# Altium PCB 主板-20190829.PcbDoc (part 5 of 6)
Units mm, origin at the board's own origin, x right, y up, seen from the top; angles counter-clockwise.
Board outline 97.69 x 103.45 mm, 2 copper layers (Top Layer, Bottom Layer); 77 components, 70 nets, 247 pads, 251 vias.
Unrouted connection lines stored in the file: 4.
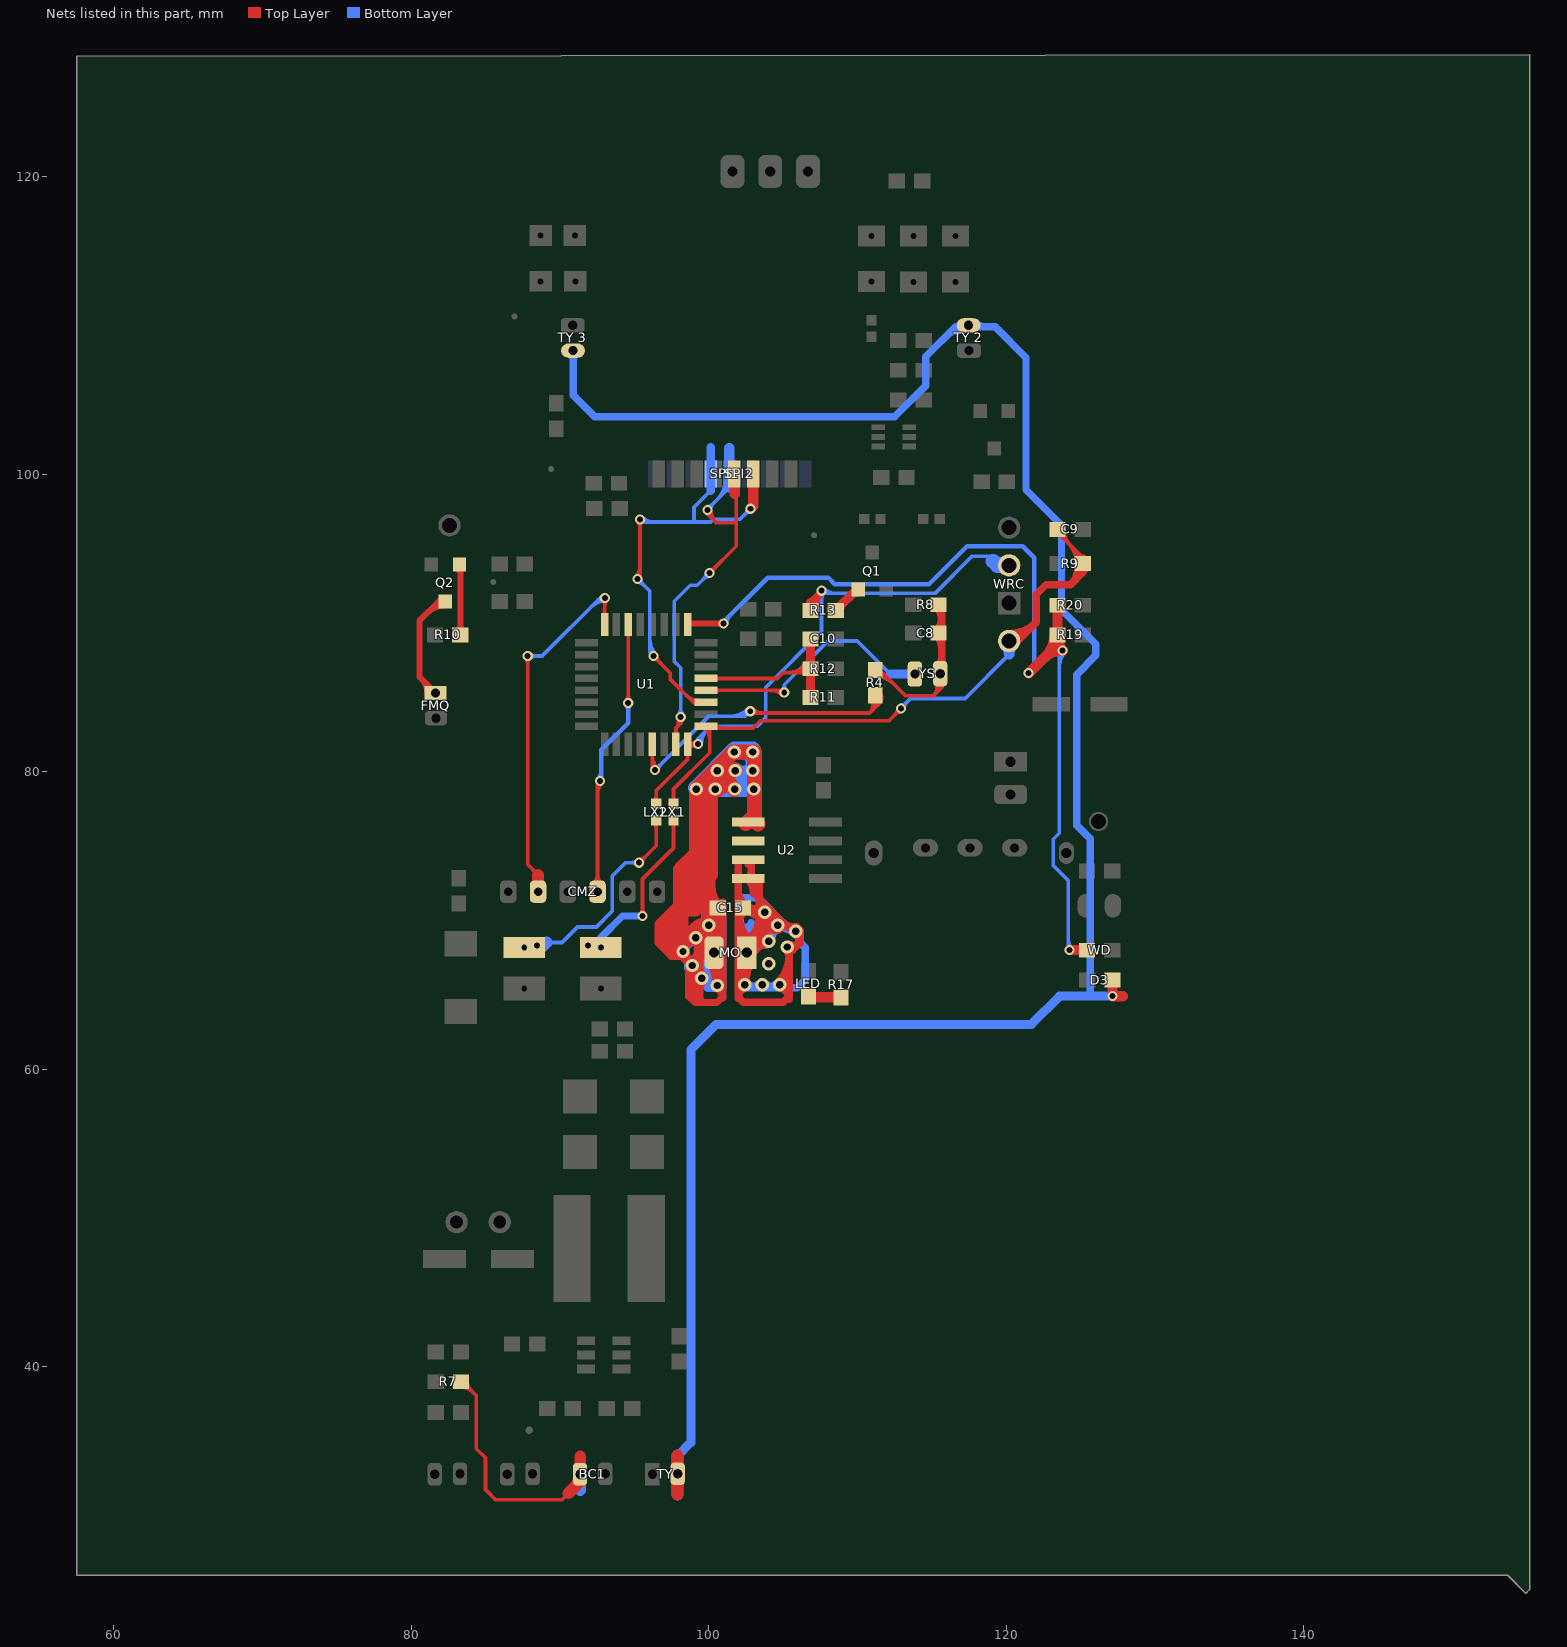
[diagram p5: the nets of this part, all layers, seen from the top]

## Via types
v1: diameter 0.9, hole 0.5, Top Layer to Bottom Layer, 107 vias
v2: diameter 0.68, hole 0.4, Top Layer to Bottom Layer, 87 vias
v3: diameter 1.1, hole 0.6, Top Layer to Bottom Layer, tented both sides, 17 vias
v4: diameter 0.6, hole 0.4, Top Layer to Bottom Layer, 7 vias
v5: diameter 0.8, hole 0.5, Top Layer to Bottom Layer, 5 vias
v6: diameter 0.7, hole 0.4, Top Layer to Bottom Layer, 5 vias
v7: diameter 1, hole 0.6, Top Layer to Bottom Layer, 4 vias
v8: diameter 1, hole 0.8, Top Layer to Bottom Layer, tented both sides, 4 vias
v9: diameter 1, hole 0.65, Top Layer to Bottom Layer, tented both sides, 4 vias
v10: diameter 1.2, hole 0.7, Top Layer to Bottom Layer, tented both sides, 2 vias
v11: diameter 1.1, hole 0.68, Top Layer to Bottom Layer, 2 vias
v12: diameter 0.8, hole 0.4, Top Layer to Bottom Layer, 2 vias
v13: diameter 0.9, hole 0.6, Top Layer to Bottom Layer, tented bottom, 1 vias
v14: diameter 0.95, hole 0.5, Top Layer to Bottom Layer, 1 vias
v15: diameter 0.9, hole 0.6, Top Layer to Bottom Layer, tented both sides, 1 vias
v16: diameter 1, hole 0.5, Top Layer to Bottom Layer, 1 vias
v17: diameter 1.1, hole 0.5, Top Layer to Bottom Layer, tented both sides, 1 vias

## Nets (pads, with @x,y where several pads share a name; then routed paths per layer and width w, separated by ;. In a path a pad name is that pad's centre, name@x,y a point inside that pad or via, vN(x,y) a via of type N, cw(c..) or ccw(c..) an arc to the next point about the centre after c; other vN are vias at no path point) (continued)
MOSI: SPI1.3 SPI2.3 U1.3 | length 39.9
  Top Layer w0.254: v2@95.074,93.115 ccw(c94.342,93.846) 95.377,93.846 ; v2(95.225,92.964) 95.377,92.812 v2(95.377,96.977) ; v2@95.226,96.827 cw(c94.863,96.463) 95.377,96.463 cw(c95.891,96.463) v2@95.528,96.827 ; v2@96.291,87.569 cw(c96.291,87.055) 96.655,87.419 cw(c97.019,87.782) v2@96.504,87.782 ; v2(96.291,87.782) 97.409,86.665 97.409,86.233 98.965,84.677 U1.3@99.825,84.677 ; 98.517,85.125 ccw(c99.3,85.907) U1.3@99.3,84.8 ; 98.951,84.691 ccw(c99.3,85.04) U1.3@99.3,84.546 ; U1.3@99.213,84.59 ccw(c99.003,84.38) 99.003,84.677 ccw(c99.003,84.974) U1.3@99.213,84.764
  Top Layer w0.7: v2(102.819,97.688) v2@102.997,97.866 ; v2@102.826,97.681 ccw(c102.414,98.094) 102.997,98.094 ; 102.997,97.993 SPI1.3@102.997,100.032
  Bottom Layer w0.254: v2@95.225,92.751 cw(c95.225,92.237) 95.588,92.6 cw(c95.952,92.964) v2@95.438,92.964 ; v2(95.225,92.964) 96.037,92.151 96.037,88.036 v2(96.291,87.782) ; v2@95.348,96.948 ccw(c95.707,97.307) 95.707,96.799 ; v2(95.377,96.977) 95.555,96.799 100.13,96.799 100.308,96.977 102.108,96.977 v2(102.819,97.688) ; v2@95.528,97.128 ccw(c96.32,97.921) 96.32,96.799 ; 96.037,88.297 ccw(c96.806,88.297) v2@96.262,87.753 ; 96.037,88.91 ccw(c97.419,88.91) v2@96.442,87.933 ; 99.009,96.799 99.009,97.79 100.14,98.921 ; v2@102.606,97.688 cw(c102.092,97.688) 102.456,97.325 cw(c102.819,96.961) v2@102.819,97.475
  Bottom Layer w0.6: 100.14,98.921 100.14,101.803
NetC4_1: C15.1 MO.2 U2.5 U2.6 | length 305
  Top Layer w0.254: 96.596,69.139 96.596,69.469 96.85,69.723 96.876,69.723 ; 97.027,68.758 ccw(c98.273,70.004) v1@98.273,68.243 ; 97.231,70.202 97.231,69.698 ; 97.461,68.325 ccw(c98.273,69.136) v1@98.273,67.989 ; 97.585,67.958 ccw(c97.585,68.607) v1@98.044,68.148 ; 97.587,68.072 96.876,68.783 ; v1@98.035,67.7 ccw(c97.447,67.157) 97.447,67.958 ; 96.876,68.783 96.876,69.723 ; 96.876,68.783 96.774,68.885 96.596,68.885 96.596,68.809 97.447,67.958 ; 96.876,69.723 96.876,70.053 97.206,69.723 ; 96.876,69.723 97.206,69.723 ; 97.079,69.367 96.952,69.367 97.231,69.647 ; 97.079,69.367 97.561,69.367 97.257,69.672 ; 97.079,69.367 96.977,69.266 96.977,68.809 97.828,67.958 97.447,67.958 ; 97.079,69.367 97.231,69.52 97.231,69.647 ; 97.206,69.723 97.231,69.698 ; 97.231,69.647 97.231,69.698 ; 97.231,69.647 97.257,69.672 ; 97.231,69.698 97.257,69.672
  Top Layer w0.5: 97.184,69.295 97.561,69.672 97.565,69.676 ; v1@97.968,67.818 v1@98.146,67.818 ; v1@98.091,68.003 cw(c97.485,68.281) 97.485,67.615 ; 98.091,70.202 97.024,70.202 ; 98.095,70.206 98.4,70.51 ; 98.095,70.507 98.098,70.51 98.4,70.51 ; 98.095,71.272 97.024,70.202 ; v1@98.119,68.047 cw(c97.739,68.361) 97.739,67.869 ; v1@98.134,68.064 ccw(c97.53,68.69) 98.4,68.69 ; v1@98.171,67.615 97.485,67.615 ; v1@98.179,68.301 98.4,68.301 98.4,68.69 ; v1@98.221,67.726 cw(c98.103,67.287) 98.497,67.514 ; 98.393,67.393 ccw(c98.908,67.908) v1@98.908,67.18 ; v1@98.458,67.581 cw(c97.857,66.98) v1@98.708,66.98 ; v1@98.465,67.864 ccw(c99.18,67.658) v1@98.654,67.132 ; v1@98.466,67.868 ccw(c98.959,67.736) 98.517,67.48 ; v1@98.473,67.92 ccw(c99.323,67.92) v1@98.722,67.318 ; 98.654,65.884 cw(c100.004,65.884) 99.049,66.838 ccw(c99.452,66.436) 98.882,66.436 ; v1@98.766,67.121 ccw(c97.26,68.628) v1@99.39,68.628 ; v1@98.842,66.791 cw(c98.697,66.376) 99.136,66.376 ; 98.882,65.029 cw(c99.799,65.029) v1@99.589,65.922 ; 98.882,65.661 cw(c99.65,65.661) v1@99.474,66.408 ; v1@98.995,68.693 cw(c98.04,67.738) 99.39,67.738 ; v1@99.02,68.671 cw(c98.691,68.209) 99.239,68.062 ; 99.028,66.529 ccw(c99.543,67.044) v1@99.543,66.316 ; v1@99.036,69.007 ccw(c98.427,70.062) v1@99.604,69.747 ; v1@99.079,66.877 ccw(c99.401,66.686) 99.136,66.421 ; v1@99.095,69.03 ccw(c99.019,69.393) 99.39,69.393 ; v1@99.115,69.033 ccw(c98.95,70.572) v1@100.266,69.757 ; v1@99.12,66.768 ccw(c98.467,67.421) 99.39,67.421 ; v1@99.12,67.192 cw(c98.467,66.539) 99.39,66.539 ; 99.136,64.927 cw(c100.405,64.927) v1@99.66,65.954 ; 99.136,65.908 cw(c99.694,65.908) v1@99.366,66.359 ; v1@99.136,65.945 ccw(c97.873,65.945) 98.766,66.838 cw(c97.26,65.332) 99.39,65.332 ; v1@99.168,68.536 ccw(c99.088,69.284) 99.727,68.888 ; v1@99.315,68.924 cw(c99.677,69.106) 99.39,69.393 ; v1@99.336,68.834 cw(c100.555,68.834) v1@99.693,69.696 ; 99.39,65.265 cw(c100.393,65.265) v1@99.684,65.975 ; 99.39,66.967 ccw(c100.393,66.967) v1@99.684,66.258 ; 99.39,67.743 cw(c101.954,67.743) v1@100.141,69.556 ; v1@99.39,68.95 cw(c100.747,68.95) v1@99.788,69.91 ; v1@99.502,66.312 cw(c99.42,66.705) 99.136,66.421 ; 99.597,70.946 cw(c100.217,70.325) C15.1@100.697,71.059 ; v1@99.93,69.51 ccw(c99.751,69.032) 99.39,69.393 ; 99.974,71.323 99.162,70.51 ; MO.2@100.075,67.108 cw(c97.988,65.021) 100.94,65.021 ; MO.2@100.075,68.573 ccw(c97.988,70.66) C15.1@100.94,70.66 ; v1@100.184,69.775 cw(c100.849,70.052) C15.1@100.225,70.412 ; v1@100.2,69.698 cw(c101.418,69.698) C15.1@100.557,70.559 ; 100.282,66.728 cw(c99.084,66.076) v1@100.392,65.69 ; C15.1@100.31,70.839 cw(c99.161,70.79) v1@99.974,69.977 ; C15.1@100.423,70.641 ccw(c99.873,69.799) 99.162,70.51 ; MO.2@100.429,67.461 cw(c99.195,66.228) 100.94,66.228 ; MO.2@100.429,68.22 ccw(c99.195,69.453) 100.94,69.453 ; v1@100.443,65.775 ccw(c99.243,66.975) MO.2@100.94,66.975 ; C15.1@100.483,70.673 cw(c99.381,69.571) 100.94,69.571 ; v1@100.506,65.45 cw(c100.226,64.793) 100.94,64.793 ; C15.1@100.65,70.653 v1@99.974,69.977 ; C15.1@100.94,71.245 100.94,64.872 100.559,64.491 99.644,64.491 ; 97.024,70.202 96.596,69.774 96.596,68.504 97.485,67.615 ; 97.739,67.869 97.828,67.958 v1@97.917,67.869 ; 97.739,67.869 v1@97.917,67.869 ; v1@97.917,67.869 98.095,67.869 v1@98.146,67.818 ; v1@97.917,67.869 v1@98.294,67.492 ; v1@98.146,67.818 98.222,67.818 98.882,67.158 v1@98.882,66.675 ; v1@98.146,67.818 98.294,67.67 v1@98.294,67.492 ; v1@98.294,67.492 v1@98.654,67.132 ; 98.4,68.69 98.4,70.51 ; 98.4,70.51 99.162,70.51 ; v1@98.654,66.904 v1@98.882,66.675 ; v1@98.654,66.904 98.654,64.922 99.085,64.491 99.644,64.491 ; v1@98.654,66.904 v1@98.654,67.132 ; v1@98.882,66.675 99.136,66.421 ; v1@98.882,66.675 98.882,65.253 99.136,64.999 ; 99.136,64.999 99.39,64.745 ; 99.136,64.999 99.136,66.421 ; 99.39,64.745 99.644,64.491 ; 99.39,64.745 99.39,69.393 ; 99.39,69.393 v1@99.974,69.977
  Top Layer w1: 97.561,69.672 97.561,68.918 98.095,68.385 ; 97.565,69.676 98.091,70.202 ; 98.098,70.51 98.505,70.917 98.628,70.917 98.984,71.272 98.984,73.863 99.162,74.041 99.974,73.228 ; v1@98.179,68.301 98.095,68.385 ; 98.211,68.501 cw(c99.136,67.575) v1@99.136,68.884 ; v1@98.223,67.92 cw(c99.654,67.92) 98.642,68.932 ; 99.074,69.364 cw(c100,68.439) v1@100,69.748 ; v1@99.149,68.882 cw(c98.868,67.812) MO.2@99.974,67.812 ; v1@99.154,68.787 ccw(c98.702,69.977) v1@99.974,69.977 ; v1@99.974,69.436 cw(c101.974,69.436) C15.1@100.56,70.85 ; v1@99.974,69.579 ccw(c101.646,69.579) MO.2@100.464,68.396 ; 99.974,71.323 v1@99.974,69.977 ; 99.974,71.425 99.974,73.228 ; 99.974,72.264 ccw(c101.974,72.264) C15.1@100.56,70.85 ; 99.974,75.082 99.974,73.228 ; v1@100.001,69.748 ccw(c99.961,68.535) 99.103,69.393 98.4,68.69 ; 100.127,78.226 cw(c101.047,78.226) v1@100.396,78.877 ; 100.127,79.223 100.127,73.076 99.974,73.228 ; v1@100.382,78.835 cw(c102.59,79.121) 101.016,80.696 ; v1@100.434,78.792 ccw(c100.406,79.4) 101.016,79.4 101.016,80.696 ; v1@100.465,78.879 ccw(c99.833,78.17) v1(99.162,78.842) ; v1@100.467,78.806 ccw(c99.142,80.131) v1@101.016,80.131 ; MO.2@100.533,67.691 99.974,68.25 v1@99.974,69.977 ; v1@100.606,80.041 ccw(c100.288,80.696) 101.016,80.696 ; v1@100.616,80.125 cw(c99.915,79.276) 101.016,79.276 ; 101.016,79.061 cw(c102.16,79.061) v1@101.76,80.133 ; 101.016,80.499 ccw(c103.41,80.499) v1@101.717,78.806 ; U2.5@102.489,76.505 102.768,76.784 103.073,76.784 103.073,81.331 v1(102.972,81.331) v1(101.727,81.331) 101.651,81.331 101.016,80.696 ; 103.073,77.064 ccw(c103.891,77.064) U2.5@103.313,76.486 ; 98.095,68.385 98.095,70.206 98.095,70.507 98.095,71.272 98.095,73.431 99.162,74.498 v1(99.162,78.842) ; 98.095,68.385 98.4,68.69 ; 98.4,68.69 ccw(c98.929,68.16) 98.226,67.902 cw(c98.929,68.16) 98.4,68.69 ; 98.4,68.69 cw(c98.937,68.152) 99.15,68.882 ccw(c98.937,68.152) 98.4,68.69 ; v1(99.162,78.842) 101.016,80.696 ; C15.1@100.56,70.85 ccw(c101.211,69.799) 99.974,69.799 cw(c101.211,69.799) C15.1@100.56,70.85
  Bottom Layer w0.5: v1@98.318,68.295 cw(c99.136,67.477) v1@99.136,68.634 ; v1@98.445,68.128 cw(c99.355,67.603) v1@99.171,68.637 ; v1@98.461,67.853 ccw(c99.028,67.652) v1@98.603,67.227 ; 98.469,67.362 ccw(c98.908,67.801) v1@98.908,67.18 ; v1@98.473,67.92 cw(c99.753,67.92) v1@98.848,68.825 ; v1@98.646,66.833 ccw(c99.051,67.06) 99.195,66.619 ; v1@98.724,66.655 ccw(c99.543,67.474) 99.543,66.316 ccw(c99.543,67.106) 100.101,66.547 ; v1@99.011,68.561 ccw(c99.236,69.052) 99.703,68.782 ; v1@99.07,66.863 ccw(c99.291,66.703) 99.098,66.51 ; v1@99.081,66.881 ccw(c99.377,66.712) 99.136,66.472 99.098,66.51 ; v1@99.082,67.078 ccw(c99.593,67.364) 99.774,66.807 ; v1@99.105,66.945 ccw(c99.765,66.828) v1@99.429,66.248 ; v1@99.105,66.951 ccw(c100.281,66.779) v1@99.441,65.938 ; v1@99.107,68.535 ccw(c99.195,69.437) MO.2@99.835,68.796 ; v1@99.111,69.032 ccw(c98.986,70.005) v1@99.835,69.514 ; v1@99.136,69.034 ccw(c99.136,70.253) v1@99.998,69.391 ; v1@99.156,69.033 ccw(c99.328,70.802) 100.584,69.545 ; v1@99.181,69.159 cw(c100,68.34) v1@100,69.498 ; v1@99.253,66.037 cw(c99.883,66.209) 99.557,66.775 ; v1@99.334,68.805 cw(c100.336,68.656) v1@99.829,69.533 ; v1@99.336,68.834 cw(c100.494,68.834) v1@99.675,69.652 ; v1@99.401,66.258 ccw(c98.753,66.906) 99.67,66.906 ; v1@99.443,68.836 ccw(c98.581,69.698) v1@99.8,69.698 ; v1@99.558,66.316 ccw(c99.607,66.94) 100.051,66.497 ; v1@99.67,65.875 cw(c100.869,65.875) MO.2@100.486,67.011 ; 99.67,66.571 cw(c100.634,66.571) MO.2@100.326,67.485 ; 99.67,67.267 cw(c100.4,67.267) MO.2@100.166,67.959 ; 99.724,68.943 ccw(c98.95,69.39) v1@99.808,69.641 ; v1@99.74,66.083 ccw(c100.478,65.96) 99.949,65.43 ; v1@99.81,69.635 cw(c98.761,69.286) 99.543,68.504 ; v1@99.858,69.556 cw(c98.107,67.804) MO.2@100.584,67.804 ; MO.2@99.897,67.906 cw(c100.723,68.595) v1@99.963,69.356 ; v1@99.903,69.523 cw(c99.139,68.141) MO.2@100.656,68.577 ; MO.2@99.974,68.18 ccw(c99.543,68.055) 99.543,68.504 ; v1@99.998,69.398 ccw(c100.002,69.997) 100.539,69.731 ; MO.2@100.029,68.063 ccw(c99.187,67.479) v1@99.187,68.504 ; v1@100.029,69.895 ccw(c100.15,70.716) 100.736,70.129 ; 100.051,65.683 cw(c102.066,65.683) MO.2@100.641,67.108 ; 100.051,66.446 cw(c100.635,66.446) MO.2@100.471,67.007 ; MO.2@100.064,67.12 cw(c99.733,66.815) 100.051,66.497 ; MO.2@100.077,68.575 ccw(c98.043,70.637) 100.94,70.637 ; MO.2@100.091,67.093 ccw(c99.886,66.865) 99.67,67.081 ; MO.2@100.11,67.077 cw(c99.334,66.096) 100.584,66.096 ; 100.115,69.076 ccw(c99.62,69.571) v1@100.284,69.792 ; MO.2@100.117,68.61 ccw(c99.413,69.545) 100.584,69.545 ; v1@100.2,69.698 cw(c101.357,69.698) 100.539,70.516 ; v1@100.212,69.91 cw(c99.314,69.011) 100.584,69.011 ; MO.2@100.281,68.226 cw(c101.145,68.947) v1@100.349,69.742 ; MO.2@100.34,66.991 ccw(c100.263,65.345) 99.098,66.51 ; v1@100.389,65.677 ccw(c99.44,65.886) 100.127,66.573 ; v1@100.403,65.719 cw(c99.949,65.932) 99.949,65.43 ; MO.2@100.428,68.219 ccw(c99.222,69.442) 100.94,69.442 ; MO.2@100.665,68.547 cw(c101.567,69.299) 100.736,70.129 ; 100.889,70.129 100.736,70.129 ; MO.2@100.94,66.975 cw(c99.243,66.975) v1@100.443,65.775 ; v1@98.603,67.227 98.603,66.777 v1@99.441,65.938 ; v1@98.603,67.227 97.968,67.862 97.968,67.945 100.66,70.637 100.94,70.637 ; 99.098,66.51 99.67,67.081 ; v1@99.187,68.504 99.187,68.58 100.736,70.129 ; v1@99.187,68.504 99.543,68.504 ; v1@99.441,65.938 99.949,65.43 ; v1@99.441,65.938 99.441,66.243 99.657,66.027 99.67,66.04 99.67,67.081 ; 99.543,68.504 100.584,69.545 ; 99.949,65.43 100.051,65.43 ; 100.051,65.43 ccw(c100.051,65.785) 100.392,65.688 cw(c100.051,65.785) 100.051,65.43 ; 100.051,65.43 100.94,65.43 100.94,70.637 ; 100.051,65.43 100.051,66.497 ; 100.051,66.497 100.127,66.573 ; 100.127,66.573 100.584,66.116 ; v1@100.443,65.775 ccw(c100.101,66.116) 100.584,66.116 ; v1@100.443,65.775 ccw(c100.102,66.116) 100.584,66.116 ; 100.584,66.116 ccw(c101.067,66.116) 100.725,65.775 cw(c101.066,66.116) 100.584,66.116 ; 100.584,66.116 100.584,69.545
  Bottom Layer w1: 100.149,79.956 cw(c100.584,79.521) v1@100.584,80.136 ; v1@100.388,78.867 cw(c100.935,78.551) 100.772,79.161 ; v1@100.405,78.884 cw(c100.74,78.337) 101.194,78.791 ; v1@100.453,78.796 ccw(c100.225,79.283) 100.737,79.446 ; v1@100.536,80.074 ccw(c101.702,80.376) v1@101.702,79.172 ; v1@100.544,80.056 ccw(c101.905,81.075) 101.905,79.375 ; v1@100.543,80.115 ccw(c101.019,79.785) 100.609,79.375 ; 100.714,80.521 ccw(c101.149,80.086) 100.534,80.086 ccw(c102.069,80.086) 100.984,79.001 ; 101.076,79.172 cw(c101.076,78.165) v1@101.788,78.877 ; 101.108,79.172 ccw(c101.108,78.165) v1@100.396,78.877 ; 101.157,78.973 ccw(c100.84,78.425) v1@100.397,78.877 ; 101.235,79.297 cw(c100.996,78.405) v1@101.796,78.867 ; 101.599,79.375 ccw(c101.599,77.675) v1@100.396,78.877 ; v1@101.695,81.369 cw(c102.122,80.862) v1@102.591,81.331 ; v1@101.703,78.838 cw(c102.397,78.883) 101.905,79.375 ; v1@101.714,81.379 cw(c102.018,80.25) v1@102.845,81.077 ; v1(101.727,81.331) v1@102.591,81.331 ; v1@101.728,80.084 ccw(c102.298,80.113) 102.298,79.542 ; v1@101.753,78.792 cw(c101.731,80.09) 100.813,79.172 ; v1@101.754,80.042 ccw(c102.247,80.941) v1@102.972,80.216 ; v1@101.788,78.876 ccw(c100.609,77.732) 100.609,79.375 ; v1@101.821,80.06 cw(c100.609,80.788) 100.609,79.375 ; v1@101.821,80.112 cw(c101.155,79.719) v1@101.702,79.172 ; v1@101.827,80.081 cw(c100.813,80.193) 100.813,79.172 ; v1@103.017,80.065 cw(c102.203,80.438) 102.203,79.542 102.298,79.542 ; v1@103.019,80.071 cw(c102.298,80.299) 102.298,79.542 ; 100.609,79.375 100.813,79.172 ; 100.609,79.375 101.905,79.375 ; 100.813,79.172 cw(c101.533,79.892) 100.535,80.096 ccw(c101.533,79.892) 100.813,79.172 ; 100.813,79.172 v1@101.702,79.172 ; 100.813,79.172 101.194,78.791 ; 101.194,78.791 v1@103.073,78.791 ; v1@101.702,79.172 101.905,79.375 ; 102.298,79.542 v1@102.972,80.216 ; v1@102.591,81.331 v1@102.845,81.077 ; v1@102.845,81.077 102.921,81.077 v1@102.972,81.128 ; v1@102.972,80.216 v1@102.972,81.128 ; v1@102.972,81.128 v1(102.972,81.331) 102.972,81.534 101.727,81.534 99.098,78.905 99.212,78.791 v1@103.073,78.791 ; v1@102.972,81.128 103.073,81.229 v1@103.073,78.791
  other v1: 100.584,65.634 99.543,66.116 98.908,66.98 98.273,67.92 99.136,68.834 100,69.698 100.432,78.842 101.752,78.842 103.022,78.842 100.584,80.086 101.778,80.086 102.972,80.086
NetC4_2: C15.2 MO.1 U2.7 U2.8 | length 165.7
  Top Layer w0.5: U2.8@101.819,72.782 cw(c101.427,72.39) 101.981,72.39 ; U2.8@101.819,72.852 ccw(c101.427,73.244) 101.981,73.244 ; U2.7@101.819,74.052 cw(c101.427,73.66) 101.981,73.66 ; U2.7@101.824,74.047 cw(c101.598,73.738) 101.981,73.738 ; 101.981,64.764 cw(c102.767,64.764) v1@102.485,65.498 ; 101.981,65.03 cw(c104.924,65.03) MO.1@102.843,67.111 ; 101.981,65.492 cw(c102.487,65.492) v1@102.305,65.964 ; 101.981,66.003 ccw(c102.731,66.003) v1@102.201,65.472 ; 101.981,66.237 cw(c103.716,66.237) MO.1@102.489,67.464 ; MO.1@101.981,67.21 ccw(c103.938,67.21) v1@102.554,65.826 ; 101.981,69.45 ccw(c103.716,69.45) MO.1@102.489,68.223 ; 101.981,69.573 cw(c103.537,69.573) C15.2@102.437,70.673 ; C15.2@101.981,70.657 ccw(c104.924,70.657) MO.1@102.843,68.576 ; 101.981,72.127 ccw(c103.537,72.127) C15.2@102.437,71.027 ; 101.981,73.762 101.981,64.872 102.337,64.516 105.004,64.516 105.41,64.922 105.41,67.996 105.639,67.996 106.172,68.529 ; C15.2@102.36,70.6 cw(c102.36,69.164) 103.375,70.179 ; MO.1@102.407,68.663 ccw(c101.794,70.151) 103.403,70.151 ; C15.2@102.537,71.027 ccw(c103.084,71.574) 103.084,70.8 ; MO.1@102.598,68.201 ccw(c102.102,69.404) 103.403,69.404 ; v1@102.605,65.74 cw(c104.105,66.169) MO.1@102.74,66.926 ; U2.8@102.619,72.782 cw(c101.656,71.812) 103.022,71.812 ; U2.8@102.619,72.852 ccw(c102.012,73.459) 102.87,73.459 ; U2.7@102.619,74.052 cw(c102.012,73.445) 102.87,73.445 ; U2.7@102.654,73.787 102.87,73.787 102.87,72.568 U2.8@103.022,72.568 ; MO.1@102.789,67.739 ccw(c102.41,68.657) 103.403,68.657 ; U2.8@103.022,72.695 U2.8@103.022,72.568 ; 103.174,70.381 ccw(c103.591,70.798) v1@103.932,70.316 ; 103.256,69.603 cw(c104.506,69.268) v1@103.859,70.388 ; 103.297,69.754 cw(c104.208,69.51) v1@103.838,70.377 ; 103.403,68.224 103.403,70.151 ; 103.403,69.22 cw(c105.1,69.22) v1@103.9,70.42 ; 103.403,69.226 ccw(c104.445,69.226) v1@103.874,68.355 ; 103.403,71.501 103.022,71.882 U2.8@103.022,72.568 ; 103.403,71.903 ccw(c105.1,71.903) v1@103.9,70.703 ; v1@103.485,70.684 ccw(c103.995,70.455) 103.716,69.971 ; v1@103.511,70.73 ccw(c104.004,70.394) 103.582,69.972 ; v1@103.573,70.635 ccw(c102.866,70.913) 103.403,71.45 105.258,69.596 ; v1@103.612,70.425 ccw(c102.755,69.632) C15.2@102.755,70.8 ; v1@103.643,70.724 cw(c103.244,71.289) C15.2@102.755,70.8 ; v1@103.767,70.361 cw(c103.797,69.57) v1@104.483,69.966 ; v1@103.924,70.449 ccw(c104.513,70.048) 104.01,69.545 ; v1@103.929,70.924 cw(c102.677,69.672) 104.448,69.672 ccw(c103.904,69.672) 104.289,70.057 ; v1@103.959,70.561 ccw(c104.748,70.561) 104.19,70.003 ; 103.985,69.57 ccw(c104.513,70.098) v1@104.739,69.386 ; 104.09,70.103 ccw(c104.648,70.662) v1@104.648,69.872 ; 104.144,70.202 ccw(c103.759,69.817) 103.759,70.361 cw(c103.759,68.591) v1@105.011,69.843 ; v1@104.148,68.773 cw(c105.052,70.151) 103.403,70.151 ; v1@104.318,69.621 104.318,69.875 v1@103.48,70.714 ; v1@104.486,69.789 cw(c104.01,70.132) 104.01,69.545 ; v1@104.587,69.863 cw(c104.233,70.981) 103.403,70.151 ; v1@104.634,65.826 ccw(c102.759,67.7) 105.41,67.7 ; v1@104.741,65.487 cw(c104.603,64.693) 105.41,64.693 ; v1@104.789,69.814 ccw(c105.315,70.339) 105.315,69.596 ; v1@104.795,69.536 cw(c105.143,69.213) 105.38,69.624 ; v1@104.798,69.804 ccw(c105.258,70.207) 105.258,69.596 ; v1@104.826,65.98 cw(c104.706,65.286) 105.41,65.286 ; v1@104.987,65.472 ccw(c103.966,66.493) 105.41,66.493 ; v1@105.023,69.83 ccw(c105.842,70.649) v1@105.842,69.491 ; v1@105.142,68.083 cw(c104.494,67.435) 105.41,67.435 ; v1@105.374,68.403 ccw(c105.686,69.015) 106.172,68.529 ; v1@105.644,69.262 ccw(c105.258,69.206) 105.258,69.596 ; v1@105.758,69.11 cw(c105.457,68.461) 106.172,68.461 ; v1@105.775,69.48 cw(c105.608,69.947) 105.258,69.596 ; C15.2@102.755,70.8 103.393,70.8 v1@103.403,70.79 ; C15.2@102.755,70.8 103.403,70.151 ; U2.8@103.022,72.568 103.403,72.568 v1@103.403,70.79 ; 103.403,70.151 104.01,69.545 ; 103.403,70.151 v1@103.403,70.714 ; v1@103.403,70.714 v1@103.403,70.79 ; v1@103.403,70.714 v1@103.48,70.714 ; v1@103.403,70.79 v1@103.48,70.714 ; v1@103.48,70.714 103.632,70.714 104.8,69.545 104.01,69.545 ; 105.258,69.596 105.918,69.596 106.172,69.342 106.172,68.529
  Bottom Layer w0.5: MO.1@102.083,66.964 ccw(c103.693,66.964) 102.554,65.826 ccw(c103.386,66.658) v1@103.386,65.481 ; 102.083,69.205 ccw(c103.471,69.205) MO.1@102.489,68.223 ; 102.083,70.412 ccw(c104.678,70.412) 102.843,68.576 cw(c103.39,69.124) 102.616,69.124 ; MO.1@102.277,68.576 ccw(c101.459,69.394) 102.616,69.394 ; MO.1@102.293,68.591 ccw(c101.148,69.869) 102.863,69.869 102.863,67.843 v1@104.616,69.596 ; MO.1@102.56,68.193 ccw(c102.56,69.771) v1@103.675,68.655 ; MO.1@102.56,68.693 ccw(c102.56,71.478) v1@104.529,69.509 ; MO.1@102.616,68.17 102.616,69.571 ; v1@102.633,65.481 ccw(c102.633,66.658) v1@103.465,65.826 ; MO.1@102.992,67.972 cw(c104.038,66.926) v1@104.038,68.405 ; MO.1@103.081,68.312 cw(c103.648,67.33) v1@103.98,68.414 ; v1@103.532,70.757 ccw(c103.91,70.431) 103.557,70.078 ; v1@103.566,70.615 ccw(c102.667,70.866) 103.327,71.526 ; v1@103.621,70.416 cw(c102.919,69.68) 103.937,69.68 ; 103.632,69.772 cw(c104.548,69.772) 103.9,70.42 ccw(c104.364,69.956) 103.708,69.956 ; 103.632,69.939 cw(c104.188,69.939) v1@103.873,70.397 ; 103.708,70.025 cw(c104.206,70.025) v1@103.887,70.408 ; v1@103.741,68.566 cw(c104.324,68.643) 103.984,69.123 ; v1@103.748,65.826 ccw(c104.58,66.658) v1@104.58,65.481 ; v1@103.759,70.361 cw(c103.759,68.591) v1@105.011,69.843 ; v1@103.767,70.361 cw(c103.797,69.57) v1@104.483,69.966 ; v1@103.802,65.481 ccw(c103.802,66.658) v1@104.634,65.826 ; v1@103.91,70.43 ccw(c104.317,70.078) 103.937,69.698 ; v1@103.929,70.924 cw(c102.677,69.672) 104.448,69.672 cw(c103.858,69.672) 104.275,69.255 ; v1@103.959,70.561 ccw(c104.703,70.561) 104.177,70.035 ; 104.1,69.261 ccw(c103.718,69.921) v1@104.455,69.724 ; 104.122,70.09 ccw(c104.648,70.616) v1@104.648,69.872 ; v1@104.237,68.632 cw(c105.25,68.767) v1@104.659,69.601 ; v1@104.238,68.615 cw(c105.532,68.68) v1@104.616,69.596 ; 104.328,69.202 ccw(c103.898,69.559) v1@104.45,69.642 ; 104.403,69.227 ccw(c103.954,69.486) v1@104.455,69.62 ; 104.428,69.271 cw(c104.816,69.047) v1@104.7,69.479 ; v1@104.498,69.804 cw(c104.038,70.207) 104.038,69.596 ; v1@104.623,69.596 cw(c104.623,68.073) v1@105.7,69.15 ; v1@104.789,69.814 ccw(c105.315,70.339) 105.315,69.596 ; v1@104.795,69.536 cw(c105.143,69.213) 105.38,69.624 ; v1@104.821,69.772 ccw(c105.476,70.15) 105.28,69.42 ; v1@104.916,65.826 ccw(c105.748,66.658) 105.748,65.481 ; v1@105.023,69.83 ccw(c105.842,70.649) v1@105.842,69.491 ; v1@105.752,69.113 cw(c105.427,68.471) 106.147,68.471 ; v1@105.775,69.48 cw(c105.608,69.947) 105.258,69.596 ; 103.327,71.526 105.258,69.596 ; 103.327,71.526 102.083,71.526 102.083,65.481 105.969,65.481 106.502,66.015 106.502,68.174 106.147,68.529 106.147,69.266 105.816,69.596 105.258,69.596 ; 103.937,69.698 103.937,69.545 103.759,69.367 103.632,69.494 103.632,69.952 103.708,70.028 103.708,69.926 103.937,69.698 ; 103.937,69.698 v1@103.937,70.275 ; 103.937,69.698 104.038,69.596 ; v1@103.937,70.275 103.937,70.421 103.625,70.732 103.48,70.732 v1@103.937,70.275 ; v1@103.937,70.275 v1@104.616,69.596 ; 104.038,69.596 v1@104.616,69.596 ; v1@104.616,69.596 105.258,69.596 ; 105.258,69.596 cw(c105.258,69.206) 105.644,69.262 ccw(c105.258,69.206) 105.258,69.596 ; 105.258,69.596 cw(c105.258,70.207) 104.798,69.804 ccw(c105.258,70.207) 105.258,69.596
  other v1: 102.413,65.684 103.607,65.684 104.775,65.684 104.038,67.107 105.283,68.224 104.038,68.605 105.842,69.291 104.648,69.672 103.759,70.561
PB7: C10.2 R11.1 R12.2 U1.5 | length 14.3
  Top Layer w0.254: U1.5@99.825,86.277 104.616,86.277 105.003,86.664 106.85,86.664 R12.2@106.85,86.932 ; U1.5@100.437,86.19 cw(c100.647,85.98) 100.647,86.277 cw(c100.647,86.574) U1.5@100.437,86.364 ; 105.254,86.664 ccw(c105.254,88.478) R12.2@106.536,87.196 ; 105.867,86.664 ccw(c105.867,87.865) R12.2@106.716,87.016
  Top Layer w0.6: R11.1@106.85,84.932 R12.2@106.85,86.932 C10.2@106.85,88.932
Q1-B: Q1.1 R13.1 | length 3.3
  Top Layer w0.254: Q1.1@110.05,92.356 Q1.1@110.05,92.55
  Top Layer w0.6: R13.1@108.55,90.856 Q1.1@110.05,92.356 ; R13.1@108.8,90.856 cw(c109.404,90.856) R13.1@108.977,91.283 ; 109.571,91.876 cw(c110.05,91.397) Q1.1@110.05,92.075
Q2-C: FMQ.1 Q2.3 | length 10.6
  Top Layer w0.4: 80.697,86.244 cw(c79.758,85.305) FMQ.1@81.086,85.305 ; 81.042,90.654 cw(c82.3,89.396) Q2.3@82.3,91.175 ; FMQ.1@81.636,85.305 80.543,86.397 80.543,90.155 81.907,91.519 Q2.3@82.144,91.282 ; 81.725,91.337 cw(c82.3,90.761) Q2.3@82.3,91.575
R7: BC1.2 R7.2 | length 27.3
  Top Layer w0.254: R7.2@83.4,38.616 cw(c83.4,37.595) 84.122,38.317 ; R7.2@83.45,38.989 84.379,38.06 84.379,34.493 84.988,33.884 84.988,31.75 85.674,31.064 90.145,31.064 BC1.2@91.344,32.264 ; R7.2@83.773,38.989 ccw(c84.553,38.989) 84.001,38.438 ; 90.571,31.491 ccw(c89.558,32.504) BC1.2@90.991,32.504 ; 91.005,31.924 ccw(c90.425,32.504) BC1.2@91.245,32.504
  Top Layer w0.8: 90.576,31.496 91.344,32.264 BC1.2@91.344,32.774 ; 90.729,31.674 91.364,32.309 91.364,33.975 ; 91.037,31.957 ccw(c90.49,32.504) 91.264,32.504 cw(c90.551,32.504) 91.055,32
  Bottom Layer w0.254: BC1.2@91.111,32.239 cw(c90.66,31.725) 91.344,31.725 ; BC1.2@91.344,32.774 91.344,31.725 ; BC1.2@91.577,32.239 ccw(c92.028,31.725) 91.344,31.725
  Bottom Layer w0.8: 91.364,31.725 BC1.2@91.364,33.325
R10: 
R19: R19.2 R20.2 U1.9 WD.2 | length 71.6
  Top Layer w0.4: U1.9@98.6,89.967 v2(100.99,89.967) v2@100.889,90.068 ; U1.9@98.635,89.867 cw(c98.876,89.626) 98.876,89.967
  Top Layer w0.7: v2@121.526,86.627 123.45,88.55 ; 122.559,87.66 cw(c123.8,86.419) v2@123.8,88.173 ; 122.649,87.75 ccw(c121.199,89.2) R19.2@123.25,89.2 ; 123.431,88.532 v2(123.8,88.163) cw(c124.401,88.765) R19.2@123.635,89.135 ; R19.2@123.45,88.983 ccw(c124.619,88.983) v2@123.793,88.156 ; R19.2@123.45,89 123.45,88.55 ; R19.2@123.45,89.2 R20.2@123.45,91.059 ; v2@123.798,88.153 cw(c123.85,88.55) 123.45,88.55 ; v2(124.257,68.021) WD.2@125.413,68.021
  Bottom Layer w0.254: 123.571,87.097 cw(c124.866,87.097) v2@123.95,88.013 ; 123.571,87.697 cw(c123.825,87.697) v2@123.811,87.951 ; 123.571,87.71 cw(c124.253,87.71) v2@123.771,88.192 ; v2@123.613,88.06 cw(c123.391,87.937) 123.571,87.757 ; v2@123.8,87.986 123.571,87.757 ; 124.181,68.719 ccw(c124.955,68.719) v2@124.407,68.172 ; v2@124.258,68.023 124.181,68.101 124.181,72.695 123.17,73.705 123.17,75.469 123.571,75.87 123.571,87.757
  Bottom Layer w0.3: v2@100.889,89.967 103.962,93.04 108.052,93.04 108.483,92.608 114.808,92.608 117.373,95.174 121.107,95.174 121.895,94.386 121.895,87.02 v2(121.514,86.639) ; v2@101.18,89.967 cw(c101.884,89.967) 101.387,90.465 ; v2@121.514,86.829 ccw(c121.514,87.288) 121.838,86.964 ccw(c122.162,86.639) v2@121.704,86.639
R21: Q2.1 R10.1 | length 7
  Top Layer w0.254: Q2.1@83.094,93.782 Q2.1@83.312,93.564
  Top Layer w0.4: Q2.1@83.073,93.748 cw(c82.497,93.172) 83.312,93.172 ; R10.1@83.088,89.412 ccw(c82.547,89.953) 83.312,89.953 ; R10.1@83.312,89 Q2.1@83.312,93.564 ; 83.312,89.895 ccw(c83.995,89.895) R10.1@83.512,89.412 ; 83.312,93.471 cw(c83.704,93.471) Q2.1@83.427,93.748
RST: C9.2 LX1.1 LX1.2 pad.0@92.75,68.182 R9.1 U1.1 WRC.1 | length 72.5
  Top Layer w0.254: v2@95.404,70.458 ccw(c95.055,70.807) 95.549,70.807 ; v2@95.549,70.307 95.549,72.791 97.638,74.879 LX1.1@97.638,76.742 ; 95.549,70.836 ccw(c96.083,70.836) v2@95.705,70.458 ; LX1.2@97.4,77.842 97.638,78.08 97.638,78.842 100.076,81.28 100.076,82.925 U1.1@100.228,83.077 ; LX1.1@97.48,76.584 cw(c97.099,76.204) 97.638,76.204 cw(c98.176,76.204) LX1.1@97.795,76.584 ; LX1.2@97.48,78 ccw(c97.099,78.38) 97.638,78.38 ccw(c98.176,78.38) LX1.2@97.795,78 ; U1.1@99.738,82.99 cw(c98.922,82.175) 100.076,82.175 ; U1.1@99.918,83.17 cw(c99.535,82.788) 100.076,82.788 ; U1.1@99.977,83.122 100.169,82.931 102.972,82.931 103.47,83.429 103.773,83.429 103.783,83.439 112.116,83.439 v2(112.928,84.252) v2@112.878,84.252 ; U1.1@100.437,83.164 ccw(c101.001,83.728) 101.001,82.931 ; v2@112.715,84.252 cw(c112.201,84.252) 112.565,83.888 cw(c112.928,83.525) v2@112.928,84.039 ; C9.2@123.45,96.3 123.699,96.051 123.699,95.859 R9.1@125.15,94.408 ; C9.2@123.5,95.927 cw(c123.5,95.612) C9.2@123.723,95.835 ; C9.2@123.619,96.3 ccw(c124.492,96.3) 123.875,95.683 ; C9.2@123.873,96.3 ccw(c125.359,96.3) 124.308,95.249 ; 124.14,95.418 cw(c122.722,94) R9.1@124.727,94 ; 124.573,94.984 cw(c123.589,94) R9.1@124.981,94 ; 125.007,94.551 cw(c124.456,94) R9.1@125.235,94
  Top Layer w0.3: pad.0@92.75,68.182 pad.0@93.337,68.182
  Top Layer w0.5: WRC.1@120.205,89.3 ccw(c120.228,91.837) 122.022,90.043 ; 121.179,89.2 cw(c120.213,90.167) WRC.1@120.2,88.8 120.779,88.8 122.022,90.043 ; R9.1@124.851,93.981 cw(c123.071,93.845) 124.333,92.583 ; R9.1@124.974,93.822 cw(c124.555,93.4) 125.15,93.4 ; 125.102,93.352 ccw(c124.501,93.954) R9.1@125.349,94.019 ; R9.1@125.15,94.408 125.15,93.4 ; R9.1@125.326,93.822 ccw(c125.745,93.4) 125.15,93.4 ; 122.022,90.043 122.022,91.923 122.682,92.583 124.333,92.583 ; 124.333,92.583 125.15,93.4
  Bottom Layer w0.254: v2(112.928,84.252) 112.878,84.252 113.563,84.938 117.246,84.938 120.2,87.891 ; v2@112.928,84.465 ccw(c112.928,84.856) 113.205,84.579 ; v2@113.141,84.252 cw(c113.778,84.252) 113.328,84.702
  Bottom Layer w0.3: pad.0@92.75,68.182 pad.0@92.75,68.849
  Bottom Layer w0.5: pad.0@92.75,68.849 94.209,70.307 v2(95.555,70.307)
  Bottom Layer w0.7: WRC.1@119.93,88.505 cw(c119.368,87.891) 120.2,87.891 ; WRC.1@120.2,88.8 120.2,87.891 ; WRC.1@120.47,88.505 ccw(c121.032,87.891) 120.2,87.891
  other v12: 91.897,68.326
RT: 
SCK: SPI1.4 SPI2.4 U1.31 | length 42.1
  Top Layer w0.254: U1.31@97.713,82.464 ccw(c97.503,82.674) 97.8,82.674 ccw(c98.097,82.674) U1.31@97.887,82.464 ; U1.31@97.8,81.853 97.8,82.939 ; v2@97.925,83.607 cw(c97.375,83.365) 97.8,82.939 ; v2@97.99,83.524 cw(c97.785,83.259) 98.12,83.259 ; 98.063,83.202 ccw(c97.739,83.525) v2@98.158,83.71 ; v2(98.12,83.693) 98.12,83.259 ; v2@98.25,83.524 ccw(c98.455,83.259) 98.12,83.259 ; v2@99.876,97.405 cw(c99.811,97.122) 100.101,97.122 ; v2@99.883,97.612 ccw(c100.458,97.612) 100.051,97.205 ; v2(99.924,97.612) 99.924,97.333 100.508,96.749 101.854,96.749 ; v2@100.025,93.523 100.051,93.497 v2(100.051,93.358) 101.854,95.161 SPI1.4@101.854,100.406 ; v2@100.051,93.571 ccw(c100.051,94.085) 100.414,93.721 ccw(c100.778,93.358) v2@100.264,93.358 ; 100.101,97.155 v2@100.101,97.434 ; v2@100.137,97.612 ccw(c101.325,97.612) 100.485,96.772 ; SPI1.4@101.516,99.346 cw(c100.701,98.531) 101.854,98.531 ; SPI1.4@101.696,99.526 cw(c101.314,99.144) 101.854,99.144 cw(c102.14,99.144) SPI1.4@101.938,99.346 ; SPI1.4@101.727,100.032 SPI1.4@101.727,100.406 ; 97.8,82.939 98.12,83.259
  Top Layer w0.7: SPI1.4@101.727,100.406 SPI1.4@101.759,99.955 ; 101.752,98.679 SPI1.4@101.752,100.21
  Bottom Layer w0.254: v2@97.97,83.844 ccw(c97.606,84.207) 98.12,84.207 ccw(c98.634,84.207) v2@98.271,83.844 ; v2(98.12,83.693) 98.12,86.995 97.688,87.427 97.688,91.465 98.762,92.539 99.231,92.539 v2(100.051,93.358) v2@100.051,93.497 ; v2@99.838,93.358 cw(c99.323,93.358) 99.687,92.994 cw(c100.051,92.63) v2@100.051,93.145 ; v2@99.898,97.638 SPI2.4@101.397,99.136 ; v2@99.924,97.825 ccw(c99.924,98.217) 100.2,97.94 ; v2@100.137,97.612 cw(c100.773,97.612) 100.323,98.063 ; 100.613,98.353 ccw(c99.409,99.557) SPI2.4@101.112,99.557 ; 101.047,98.786 ccw(c100.276,99.557) SPI2.4@101.366,99.557
  Bottom Layer w0.7: SPI2.4@101.397,99.136 101.397,101.752
SWIM/BT: LX2.1 LX2.2 pad.0@87.6,68.182 R13.2 U1.32 WRC.3 | length 67.6
  Top Layer w0.254: v2(95.326,73.889) 96.469,75.032 LX2.1@96.469,76.742 ; v2@95.326,74.102 ccw(c95.326,74.616) 95.69,74.252 ccw(c96.053,73.889) v2@95.539,73.889 ; LX2.1@96.312,76.584 cw(c95.931,76.204) 96.469,76.204 cw(c97.008,76.204) LX2.1@96.627,76.584 ; LX2.2@96.312,78 ccw(c95.931,78.38) 96.469,78.38 ccw(c97.008,78.38) LX2.2@96.627,78 ; LX2.2@96.469,77.842 96.469,78.74 98.6,80.871 U1.32@98.6,81.852 ; U1.32@98.513,81.24 cw(c98.303,81.031) 98.6,81.031 cw(c98.897,81.031) U1.32@98.687,81.24 ; U1.32@98.687,81.765 cw(c98.925,81.527) 98.925,81.864 ; U1.32@98.687,81.939 ccw(c98.869,82.121) 98.869,81.864 ; U1.32@98.69,81.937 ccw(c98.857,82.093) 98.857,81.864 ; U1.32@98.701,81.783 cw(c98.857,81.675) 98.857,81.864 ; U1.32@98.832,81.839 cw(c99.11,81.561) v2@99.309,81.899 ; v2@99.12,81.735 ccw(c98.857,81.533) 98.857,81.864 ; v2@99.12,81.994 cw(c98.857,82.195) 98.857,81.864 ; v2@99.18,81.681 ccw(c98.937,81.27) 98.6,81.607 98.857,81.864 ; v2(99.289,81.864) 98.857,81.864
  Top Layer w0.5: R13.2@106.651,90.836 cw(c107.346,90.891) 106.853,91.384 ; 106.85,91.381 107.62,92.151 ccw(c108.768,91.003) R13.2@107.149,90.875
  Top Layer w0.6: R13.2@106.85,90.856 106.85,91.381
  Bottom Layer w0.254: 89.103,68.529 90.145,68.529 91.186,69.571 92.456,69.571 93.523,70.637 93.523,73 94.412,73.889 v2(95.326,73.889) ; v2@95.176,73.738 ccw(c94.812,73.374) 94.812,73.889 ccw(c94.812,74.403) v2@95.176,74.039 ; v2@99.188,82.052 ccw(c99.098,82.22) 99.289,82.22 ; v2@99.248,81.864 cw(c100.007,81.864) 99.47,82.401 ; v2(99.289,81.864) 99.289,82.22 ; v2@99.389,82.052 cw(c99.479,82.22) 99.289,82.22 ; v2@99.502,81.864 cw(c100.874,81.864) 99.904,82.835 ; v2@107.444,92.026 cw(c107.08,91.662) 107.594,91.662 cw(c108.109,91.662) v2@107.745,92.026 ; v2@107.565,92.148 ccw(c107.925,92.507) 107.925,91.999 ; v2@107.594,91.973 107.594,89.433 103.835,85.674 103.835,83.642 103.251,83.058 100.127,83.058 99.289,82.22 ; v2(107.594,92.177) 107.772,91.999 115.214,91.999 117.704,94.488 119.126,94.488 119.126,94.158 ; v2@107.745,92.327 ccw(c108.538,93.12) 108.538,91.999
  Bottom Layer w0.8: pad.0@87.6,68.182 pad.0@87.968,68.182 ; pad.0@88.449,68.442 ccw(c88.719,68.913) 89.103,68.529 ; pad.0@87.968,68.182 cw(c88.341,67.81) v12(88.443,68.326) ; pad.0@87.968,68.182 pad.0@87.986,68.199 ; pad.0@87.986,68.199 cw(c88.327,67.858) v12(88.443,68.326) ; pad.0@87.986,68.199 88.773,68.199 89.103,68.529 ; v12(88.443,68.326) ccw(c88.581,69.051) 89.103,68.529
  Bottom Layer w1: WRC.3@120.054,94.083 cw(c119.634,94.666) 119.126,94.158 119.431,93.853 WRC.3@120.2,93.853
T-LED: LED.2 R17.1 | length 2.3
  Top Layer w0.7: LED.2@106.6,64.831 107.544,64.831 R17.1@108.9,64.831
TEMP: 
TY: "TY 2.1" "TY 3.1" D3.2 TY.1 | length 153.7
  Top Layer w0.7: D3.2@127.15,66 v2(127.15,64.92) 127.846,64.92
  Top Layer w0.8: 97.917,31.394 97.917,34.026
  Bottom Layer w0.5: 90.719,108.156 cw(c90.326,107.764) 90.881,107.764 cw(c91.436,107.764) 91.044,108.156 ; 90.881,108.419 90.881,105.308 92.329,103.861 112.497,103.861 114.605,105.969 114.605,107.925 116.599,109.919 ; 115.984,109.304 cw(c117.155,108.133) 117.155,109.789 ; 116.953,110.129 cw(c116.599,110.322) 116.599,109.919 ; 117.958,110.182 ccw(c118.591,110.815) 118.591,109.919 ; v2(127.15,64.92) 125.885,64.92 125.882,64.922 125.654,65.151 125.654,75.489 124.739,76.403 124.739,86.538 126.035,87.833 126.035,88.595 123.723,90.907 123.723,96.571 121.336,98.958 121.336,107.848 119.265,109.919 116.599,109.919
  Bottom Layer w0.6: 97.916,34.032 98.806,34.922 98.806,61.316 100.508,63.017 121.691,63.017 123.596,64.922 125.882,64.922 v2@127.15,64.922
  Bottom Layer w0.8: 97.917,31.42 97.917,34.052
Y30: CMZ.6 U1.16 | length 29.3
  Top Layer w0.254: v2@87.683,87.632 cw(c87.319,87.268) 87.833,87.268 cw(c88.347,87.268) v2@87.984,87.632 ; v2@87.833,87.96 87.833,73.762 88.53,73.065 ; v2@92.864,91.543 cw(c92.501,91.18) 93.015,91.18 cw(c93.529,91.18) v2@93.165,91.543 ; U1.16@92.913,90.514 ccw(c92.703,90.724) 93,90.724 ccw(c93.297,90.724) U1.16@93.087,90.514 ; U1.16@93,89.902 93,90.917 93.015,90.932 v2(93.015,91.694)
  Top Layer w0.8: CMZ.6@88.53,71.944 88.53,73.065
  Bottom Layer w0.254: v2(87.833,87.782) 88.798,87.782 92.71,91.694 v2(93.015,91.694) ; v2@87.984,87.632 cw(c88.347,87.268) 88.347,87.782 cw(c88.347,88.297) v2@87.984,87.933 ; 92.131,91.115 cw(c93.015,90.231) v2@93.015,91.481 ; 92.564,91.548 cw(c93.015,91.098) v2@93.015,91.735
Y30-D: 
Y>: CMZ.4 U1.14 | length 23.9
  Top Layer w0.254: CMZ.4@92.231,72.443 ccw(c91.509,73.165) 92.53,73.165 ccw(c93.551,73.165) CMZ.4@92.829,72.443 ; CMZ.4@92.53,71.944 92.53,79.124 v2@92.786,79.38 ; 92.53,78.485 cw(c93.583,78.485) v2@92.838,79.23 ; v2@94.439,84.783 ccw(c94.05,85.172) 94.6,85.172 ; U1.14@94.513,89.29 cw(c94.303,89.08) 94.6,89.08 cw(c94.897,89.08) U1.14@94.687,89.29 ; 94.6,85.122 ccw(c95.079,85.122) v2@94.74,84.783 ; U1.14@94.6,89.902 94.6,84.851 v2@94.793,84.658
  Bottom Layer w0.3: v2@92.553,79.515 ccw(c91.991,80.077) 92.786,80.077 ; v2@92.786,79.38 92.786,81.483 94.59,83.287 v2(94.59,84.633) ; v2@94.455,84.498 cw(c94.131,84.174) 94.59,84.174 cw(c95.048,84.174) v2@94.724,84.498
  other v2: 92.688,79.38
YS: C8.2 R4.1 R8.1 YS.1 | length 19.6
  Top Layer w0.254: R4.1@111.2,86.427 cw(c111.2,84.685) 112.432,85.917 ; R4.1@111.2,86.681 cw(c111.2,85.552) 111.998,86.35 ; R4.1@111.464,86.536 cw(c111.694,86.306) R4.1@111.694,86.632 ; R4.1@111.5,86.632 111.717,86.632 113.233,85.115 115.113,85.115 ; YS.1@115.253,86.063 cw(c114.545,85.684) 115.113,85.115 ; 115.355,85.357 ccw(c114.86,85.852) YS.1@115.477,86.183 ; YS.1@115.483,85.886 cw(c115.43,85.658) 115.664,85.658 cw(c116.085,85.658) YS.1@115.802,85.969 ; 115.597,85.599 ccw(c115.175,86.021) YS.1@115.701,86.303 ; YS.1@115.664,86.075 115.664,85.667 115.113,85.115
  Top Layer w0.5: C8.2@115.323,89.155 cw(c114.5,88.332) 115.664,88.332 ; C8.2@115.323,89.509 ccw(c114.5,90.332) 115.664,90.332 ; R8.1@115.323,91.055 cw(c114.5,90.232) 115.664,90.232 ; YS.1@115.401,87.133 ccw(c114.767,87.767) 115.664,87.767 ; YS.1@115.664,86.6 R8.1@115.664,91.44
YS-U: R4.2 U1.29 | length 28.7
  Top Layer w0.254: U1.29@96.113,81.241 cw(c95.903,81.031) 96.2,81.031 cw(c96.497,81.031) U1.29@96.287,81.241 ; 96.2,80.478 ccw(c96.76,80.478) v2@96.364,80.083 ; U1.29@96.2,81.091 ccw(c97.373,81.091) v2@96.544,80.262 ; U1.29@96.2,81.853 96.2,80.304 v2(96.393,80.112) ; v2(102.794,84.074) 102.921,83.947 110.82,83.947 ; v2@102.944,84.225 ccw(c103.615,84.895) 103.615,83.947 ; R4.2@110.897,84.883 cw(c110.307,84.46) 110.82,83.947 ; 111.032,84.159 ccw(c110.554,84.637) R4.2@111.103,85.031 ; R4.2@111.178,84.728 cw(c111.165,84.493) 111.4,84.493 ; 111.244,84.37 ccw(c110.8,84.814) R4.2@111.31,85.179 ; R4.2@111.4,84.932 111.4,84.527 110.82,83.947 ; 111.455,84.582 ccw(c111.047,84.99) R4.2@111.516,85.327
  Bottom Layer w0.254: v2(96.393,80.112) 100.025,83.744 102.464,83.744 v2(102.794,84.074) ; v2@96.393,80.325 ccw(c96.393,80.839) 96.757,80.475 ccw(c97.12,80.112) v2@96.606,80.112 ; 101.482,83.744 ccw(c101.482,85.385) v2@102.643,84.225 ; 102.096,83.744 ccw(c102.096,84.772) v2@102.823,84.045
YS_D: U1.4 YS.2 | length 19
  Top Layer w0.254: U1.4@99.825,85.478 104.932,85.471 v2(105.081,85.321) ; U1.4@100.437,85.39 cw(c100.645,85.182) 100.645,85.476 ; U1.4@100.437,85.564 ccw(c100.649,85.776) 100.649,85.476 ; 104.205,85.472 cw(c104.204,84.445) v2@104.931,85.17
  Bottom Layer w0.254: v2@104.931,85.471 ccw(c104.567,85.835) 105.081,85.835 ccw(c105.596,85.835) v2@105.232,85.471 ; v2(105.081,85.321) 105.081,85.854 108.018,88.79 109.99,88.79 112.206,86.574
  Bottom Layer w0.6: 112.206,86.574 YS.2@113.996,86.574
ZFKZ: 
pads on no net: C19.1 U5.3@113.495,103.164 U6.6
copper on no net:
  other v8: 93.345,45.314 93.345,46.761 93.345,48.26 93.345,49.708
  other v9: 93.269,43.917

## Polygon pours and split planes (outlines as drawn)
GND on Bottom Layer "Top Layer-No Net" (solid, remove dead copper, pour order 3): 90.744,111.471 85.892,111.471 85.892,99.992 85.914,99.97 85.858,99.914 83.225,99.914 82.608,99.914 79.964,97.27 79.949,97.255 79.949,62.5 79.949,62.17 80.558,61.56 80.787,61.331 84.495,61.331 84.495,60.976 85.842,59.63 86.07,59.401 86.07,55.21 85.74,55.21 84.013,53.483 83.683,53.813 80.482,53.813 80.203,53.813 79.873,53.483 79.898,53.457 79.898,52.06 84.292,52.06 85.537,50.816 85.765,50.587 85.765,46.625 85.765,45.253 85.537,45.025 84.978,44.466 84.572,44.466 80.533,44.466 80.279,44.72 80,44.44 80,44.009 80,31.571 79.964,31.535 79.974,31.525 79.974,30.801 80.101,30.801 80.381,30.521 80.609,30.293 80.838,30.293 81.207,30.293 81.24,30.26 98.288,30.26 98.864,30.26 99.024,30.42 99.507,30.902 99.507,30.928 99.507,31.484 99.564,31.541 99.564,60.164 99.564,60.601 100.548,61.585 101.082,62.119 101.158,62.119 121.272,62.119 121.294,62.141 121.367,62.068 121.706,62.068 121.808,62.068 122.418,61.458 122.57,61.306 122.57,60.773 122.57,58.969 122.748,58.791 122.748,58.156 122.799,58.156 123.256,57.699 123.434,57.521 123.891,57.521 124.246,57.521 124.348,57.42 126.71,57.42 127.447,57.42 128.056,58.029 128.464,58.437 128.464,59.456 128.464,97.037 127.086,98.415 125.389,98.415 123.815,99.99 123.728,99.904 122.275,99.904 122.275,100.009 122.214,100.07 122.164,100.121 122.164,111.471 115.255,111.471 115.204,111.522 115.229,111.496 115.229,105.045 115.204,105.045 113.883,103.724 113.731,103.572 93.792,103.572 92.776,103.572 91.988,104.359 90.744,105.604 90.744,107.128 90.744,111.09 91.099,111.446
GND on Top Layer "Top Layer-No Net" (hatched 90Degree grid 0.508 track 0.254, remove dead copper, pour order 6): 99.676,34.997 80.035,34.997 80.061,35.022 80.061,46.071 85.471,46.071 85.522,46.122 85.547,46.147 85.547,50.846 85.547,50.897 85.445,50.999 85.217,51.227 82.042,51.227 81.94,51.227 81.204,50.491 81.204,49.703 81.204,48.662 80.061,48.662 80.061,53.844 80.111,53.894 80.365,54.148 80.365,54.174 84.277,54.174 84.531,54.428 86.512,56.409 86.588,56.409 86.588,59.609 86.436,59.762 85.268,60.93 83.947,60.93 80.721,60.93 80.035,61.616 80.076,61.657 80.076,78.288 80.076,78.649 80.264,78.837 80.277,78.85 80.639,78.85 83.076,78.85 83.076,78.851 83.076,81.381 80.732,81.381 80.702,81.411 80.685,81.428 80.416,81.428 80.416,81.504 80.086,81.834 80.076,81.844 80.076,82.027 80.076,97.301 81.51,98.734 83.236,98.734 83.236,98.827 84.252,99.843 84.459,100.051 86.076,100.051 86.076,112.162 86.914,113 90.246,113 90.246,105.406 92.176,103.475 92.43,103.729 111.455,103.729 113.157,103.729 114.782,105.355 114.859,105.431 114.859,112.34 122.25,112.34 122.352,112.441 122.387,112.406 122.387,99.934 123.937,99.934 125.171,98.7 125.4,98.471 127.076,98.471 127.172,98.471 128.576,97.068 128.625,97.018 128.625,82.139 128.625,81.733 128.524,81.631 128.295,81.403 128.194,81.403 125.578,81.403 125.556,81.381 125.556,78.881 127.808,78.881 127.838,78.851 127.852,78.837 128.321,78.837 128.321,78.736 128.549,78.507 128.576,78.48 128.576,78.168 128.576,65.196 128.6,65.172 128.016,64.588 123.723,64.588 123.596,64.715 122.021,63.14 122.021,62.175 120.066,62.175 120.015,62.124 119.964,62.175 101.346,62.175 100.635,62.175 99.974,61.514 99.676,61.216 99.676,60.195 99.676,35.022

## Keep-outs
Keep-Out Layer:
  circle w0.1: c125.775,60.079 r1.5
  circle w0.1: c89.13,119.579 r1.45
  circle w0.1: c119.262,119.579 r1.45
  circle w0.1: c82.557,57.679 r1.45
  lines w0.1: 80,58.793 80,78.216 cw(c80.562,78.216) 80.562,78.778 ; 80,59.154 80,31.494 ccw(c81.276,31.494) 81.276,30.218 98.326,30.218 ccw(c98.318,31.5) 99.6,31.5 99.6,60.123 cw(c101.577,60.123) 101.577,62.1 121.53,62.1 cw(c121.53,60.884) 122.746,60.884 122.746,59.436 ccw(c124.8,59.436) 124.8,57.382 ; 80,81.955 80,97.229 85.95,99.929 86,99.979 86,119.634 cw(c88.245,119.634) 88.245,121.879 ; 80.01,81.955 ccw(c80.626,81.955) 80.626,81.339 ; 80.562,78.779 83,78.779 ; 80.626,81.339 83,81.339 ; 83,78.809 83,81.309 ; 88.195,121.879 90.922,121.879 92.431,120.371 99.187,120.371 100.695,121.879 107.458,121.879 108.737,120.599 111.76,120.599 113.04,121.879 120.141,121.879 ; 94.25,66.232 86.1,66.232 86.1,67.462 94.25,67.462 ; 94.3,66.232 94.3,67.462 ; 119.941,121.879 cw(c119.941,119.57) 122.25,119.57 122.25,100.029 122.311,99.862 128.5,96.996 128.5,81.869 ; 124.8,57.382 126.467,57.382 ccw(c126.467,59.415) 128.5,59.415 128.5,78.096 ; 125.48,78.809 125.48,81.309 ; 125.495,78.779 127.787,78.779 ; 125.495,81.339 127.94,81.339 ccw(c127.94,81.899) 128.5,81.899 ; 127.787,78.779 cw(c127.787,78.066) 128.5,78.066 ; 87.757,113.673 91.825,113.673 91.825,115.333 87.757,115.333 87.757,113.673 ; 93.218,106.07 93.218,117.297 94.082,118.161 107.645,118.161 108.356,117.45 108.356,106.07 107.772,105.486 93.802,105.486 93.218,106.07 ; 109.728,113.673 118.085,113.673 118.085,115.333 109.728,115.333 109.728,113.673
  lines w0.15: 89.738,64.668 90.805,64.668

## Other copper
Top Layer:
  rectangle net 5V: 86.258,51.664 87.884,54.381
  rectangle net GND: 87.237,38.608 89.306,40.538
  rectangle net GND: 86.563,36.373 88.951,38.622
  rectangle net BT: 114.122,63.83 116.992,65.608
  rectangle net NetC4_1: 100.635,75.082 103.149,76.632
  rectangle net NetC4_1: 100.482,76.352 103.022,79.35
  rectangle net BT: 106.985,76.759 121.641,78.765
  rectangle net GND: 118.262,80.01 123.977,82.88
  rectangle net GND: 106.248,80.493 118.415,82.525
  rectangle net BT: 113.817,72.542 117.983,77.14
  rectangle net BT: 115.087,65.938 118.059,73.203
  rectangle net BT: 121.488,76.759 122.453,78.867
  rectangle net 8.4V: 120.345,73.406 122.174,75.514
  rectangle net 8.4V: 120.396,67.131 122.422,75.108
  rectangle net NetC4_2: 102.108,64.516 103.759,74.143
  rectangle net NetC4_2: 103.53,64.491 105.181,69.825
  rectangle net NetC4_2: 105.08,68.047 105.943,69.596
  rectangle net NetC4_1: 101.194,78.994 102.946,81.534
  rectangle net NetC4_1: 100.178,64.872 101.194,80.264
  rectangle net NetC4_1: 99.314,64.694 100.635,69.139
  rectangle net NetC4_1: 98.933,74.524 99.715,78.689
  rectangle net NetC4_1: 98.4,67.054 100.046,70.714
  rectangle net GND: 86.868,62.56 88.265,65.354
Bottom Layer:
  rectangle net GND: 94.158,43.129 95.098,51.13
  rectangle net GND: 91.669,50.546 95.301,62.967
  rectangle net GND: 87.325,41.91 92.481,62.992
  rectangle net GND: 87.173,36.322 94.59,43.104
  rectangle net GND: 89.023,37.059 91.08,40.437
  rectangle net GND: 86.106,63.373 89.179,64.643
  rectangle net GND: 106.07,100.432 107.798,102.464
  rectangle net BT: 106.832,77.013 121.742,78.842
  rectangle net GND: 105.639,80.315 121.488,82.499
  rectangle net GND: 104.572,79.223 106.172,81.432
  rectangle net BT: 114.833,73.914 117.704,77.572
  rectangle net 8.4V: 120.32,73.406 122.606,75.717
  rectangle net 8.4V: 119.583,67.029 122.301,74.447
  rectangle net BT: 115.087,68.758 117.907,72.822
  rectangle net GND: 85.788,39.751 89.484,41.453
  rectangle net NetC4_2: 102.21,65.43 106.299,69.393
  rectangle net NetC4_2: 102.159,68.123 103.683,71.399
  rectangle net NetC4_1: 100.279,65.38 101.143,70.51
  rectangle net NetC4_1: 98.679,66.497 100.99,68.834
  rectangle net NetC4_1: 98.273,67.513 98.781,68.428
  rectangle net GND: 85.95,43.917 88.138,54.051
  rectangle net NetC4_1: 100.99,79.654 102.514,81.178
  rectangle net 8.4V: 121.793,66.497 121.818,66.548
  rectangle net 8.4V: 120.675,66.396 121.818,67.488
  rectangle net BT: 115.214,66.319 117.983,69.266
  rectangle net BT: 115.976,65.151 118.059,66.802
  rectangle net GND: 110.109,64.338 112.624,72.187
  rectangle net GND: 109.118,64.338 112.624,66.116

## Silkscreen, mask and mechanical layers (free items; w line width, h text height)
Top Overlay:
  circle w0.18: c84.556,47.346 r3.15
  circle w0.16: c125.175,84.532 r2.5
  lines w0.16: 105.156,63.144 105.17,63.158 ; 109.652,96.215 109.652,97.765 112.37,97.765 112.37,96.215 109.652,96.215 ; 110.236,108.534 111.658,108.534 111.658,111.074 110.236,111.074 110.236,108.534 ; 113.64,96.19 116.281,96.19 116.281,97.815 113.64,97.815 113.64,96.19
  lines w0.2: 94.894,102.006 94.894,105.08 ; 94.894,118.389 94.894,120.142 ; 107.29,101.776 107.29,105.029
  lines w0.22: 94.78,30.582 98.628,30.582 ; 117.096,63.629 120.5,63.629 ; 117.125,63.598 117.125,68.729 ; 117.125,68.727 111.121,68.727 111.121,76.116 123.999,76.116 ; 120.5,63.598 120.5,68.729 ; 120.525,68.729 123.973,68.727 123.973,76.116 ; 122.475,81.748 127.825,81.748 ; 122.475,81.823 122.475,85.95 123.778,87.253 ; 123.825,87.273 127.85,87.273 127.85,81.773 ; 127.85,81.779 127.875,81.804 ; 81.198,45.904 81.198,50.635 87.924,50.635 87.917,44.035 83.067,44.035 81.198,45.904
  text "G-" at 97.739,118.745 h1.3
  text "-R" at 108.331,118.72 h1.3
  text "BC2" at 92.227,117.145 h1 r90
  text "OUT1" at 87.3,116.281 h0.9 r90
  text "GND" at 119.482,113.335 h1 r90
  text "HWPOW" at 109.576,112.116 h0.9 r90
  text "BC1" at 87.376,111.938 h1 r90
  text "OUT2" at 93.066,111.785 h0.9 r90
  text "GND" at 83.922,96.774 h1 r24
  text "CE" at 99.67,96.698 h0.9 r90
  text "IRQ" at 106.045,95.936 h0.9 r90
  text "GND" at 98.374,95.809 h0.9 r90
  text "3V3" at 97.079,95.783 h0.9 r90
  text "SCK" at 102.184,95.733 h0.9 r90
  text "CSN" at 100.889,95.656 h0.9 r90
  text "MOSI" at 103.429,95.148 h0.9 r90
  text "MISO" at 104.699,95.047 h0.9 r90
  text "SWIM/BTC" at 112.624,93.447 h0.8
  text "16" at 92.507,90.957 h0.7 r90
  text "RST" at 119.151,86.309 h0.8
  text "+" at 120.193,83.947 h1.8
  text "1" at 100.609,81.661 h0.8
  text "+" at 122.911,77.241 h2.5
  text "Y>" at 93.04,73.609 h1 r90
  text "3.3V" at 86.944,73.584 h1 r90
  text "GN" at 97.079,73.584 h1 r90
  text "AM" at 90.983,73.558 h1 r90
  text "Y30" at 89.078,73.533 h1 r90
  text "<Z" at 94.996,73.457 h1 r90
  text "SWIM" at 86.309,69.367 h0.8
  text "RST" at 91.796,69.291 h0.8
  text "TEMP" at 124.79,69.012 h0.8
  text "+" at 94.742,64.541 h2
  text "5V" at 89.383,62.306 h1.2
  text "+" at 98.603,61.544 h2
  text "GND" at 87.706,61.417 h1 r90
  text "+" at 80.594,43.459 h2
  text "+" at 99.314,35.077 h1.5 r90